# EAGLE board BSK1+BSK3+PL (EAGLE 9.4.2), part 1 of 2
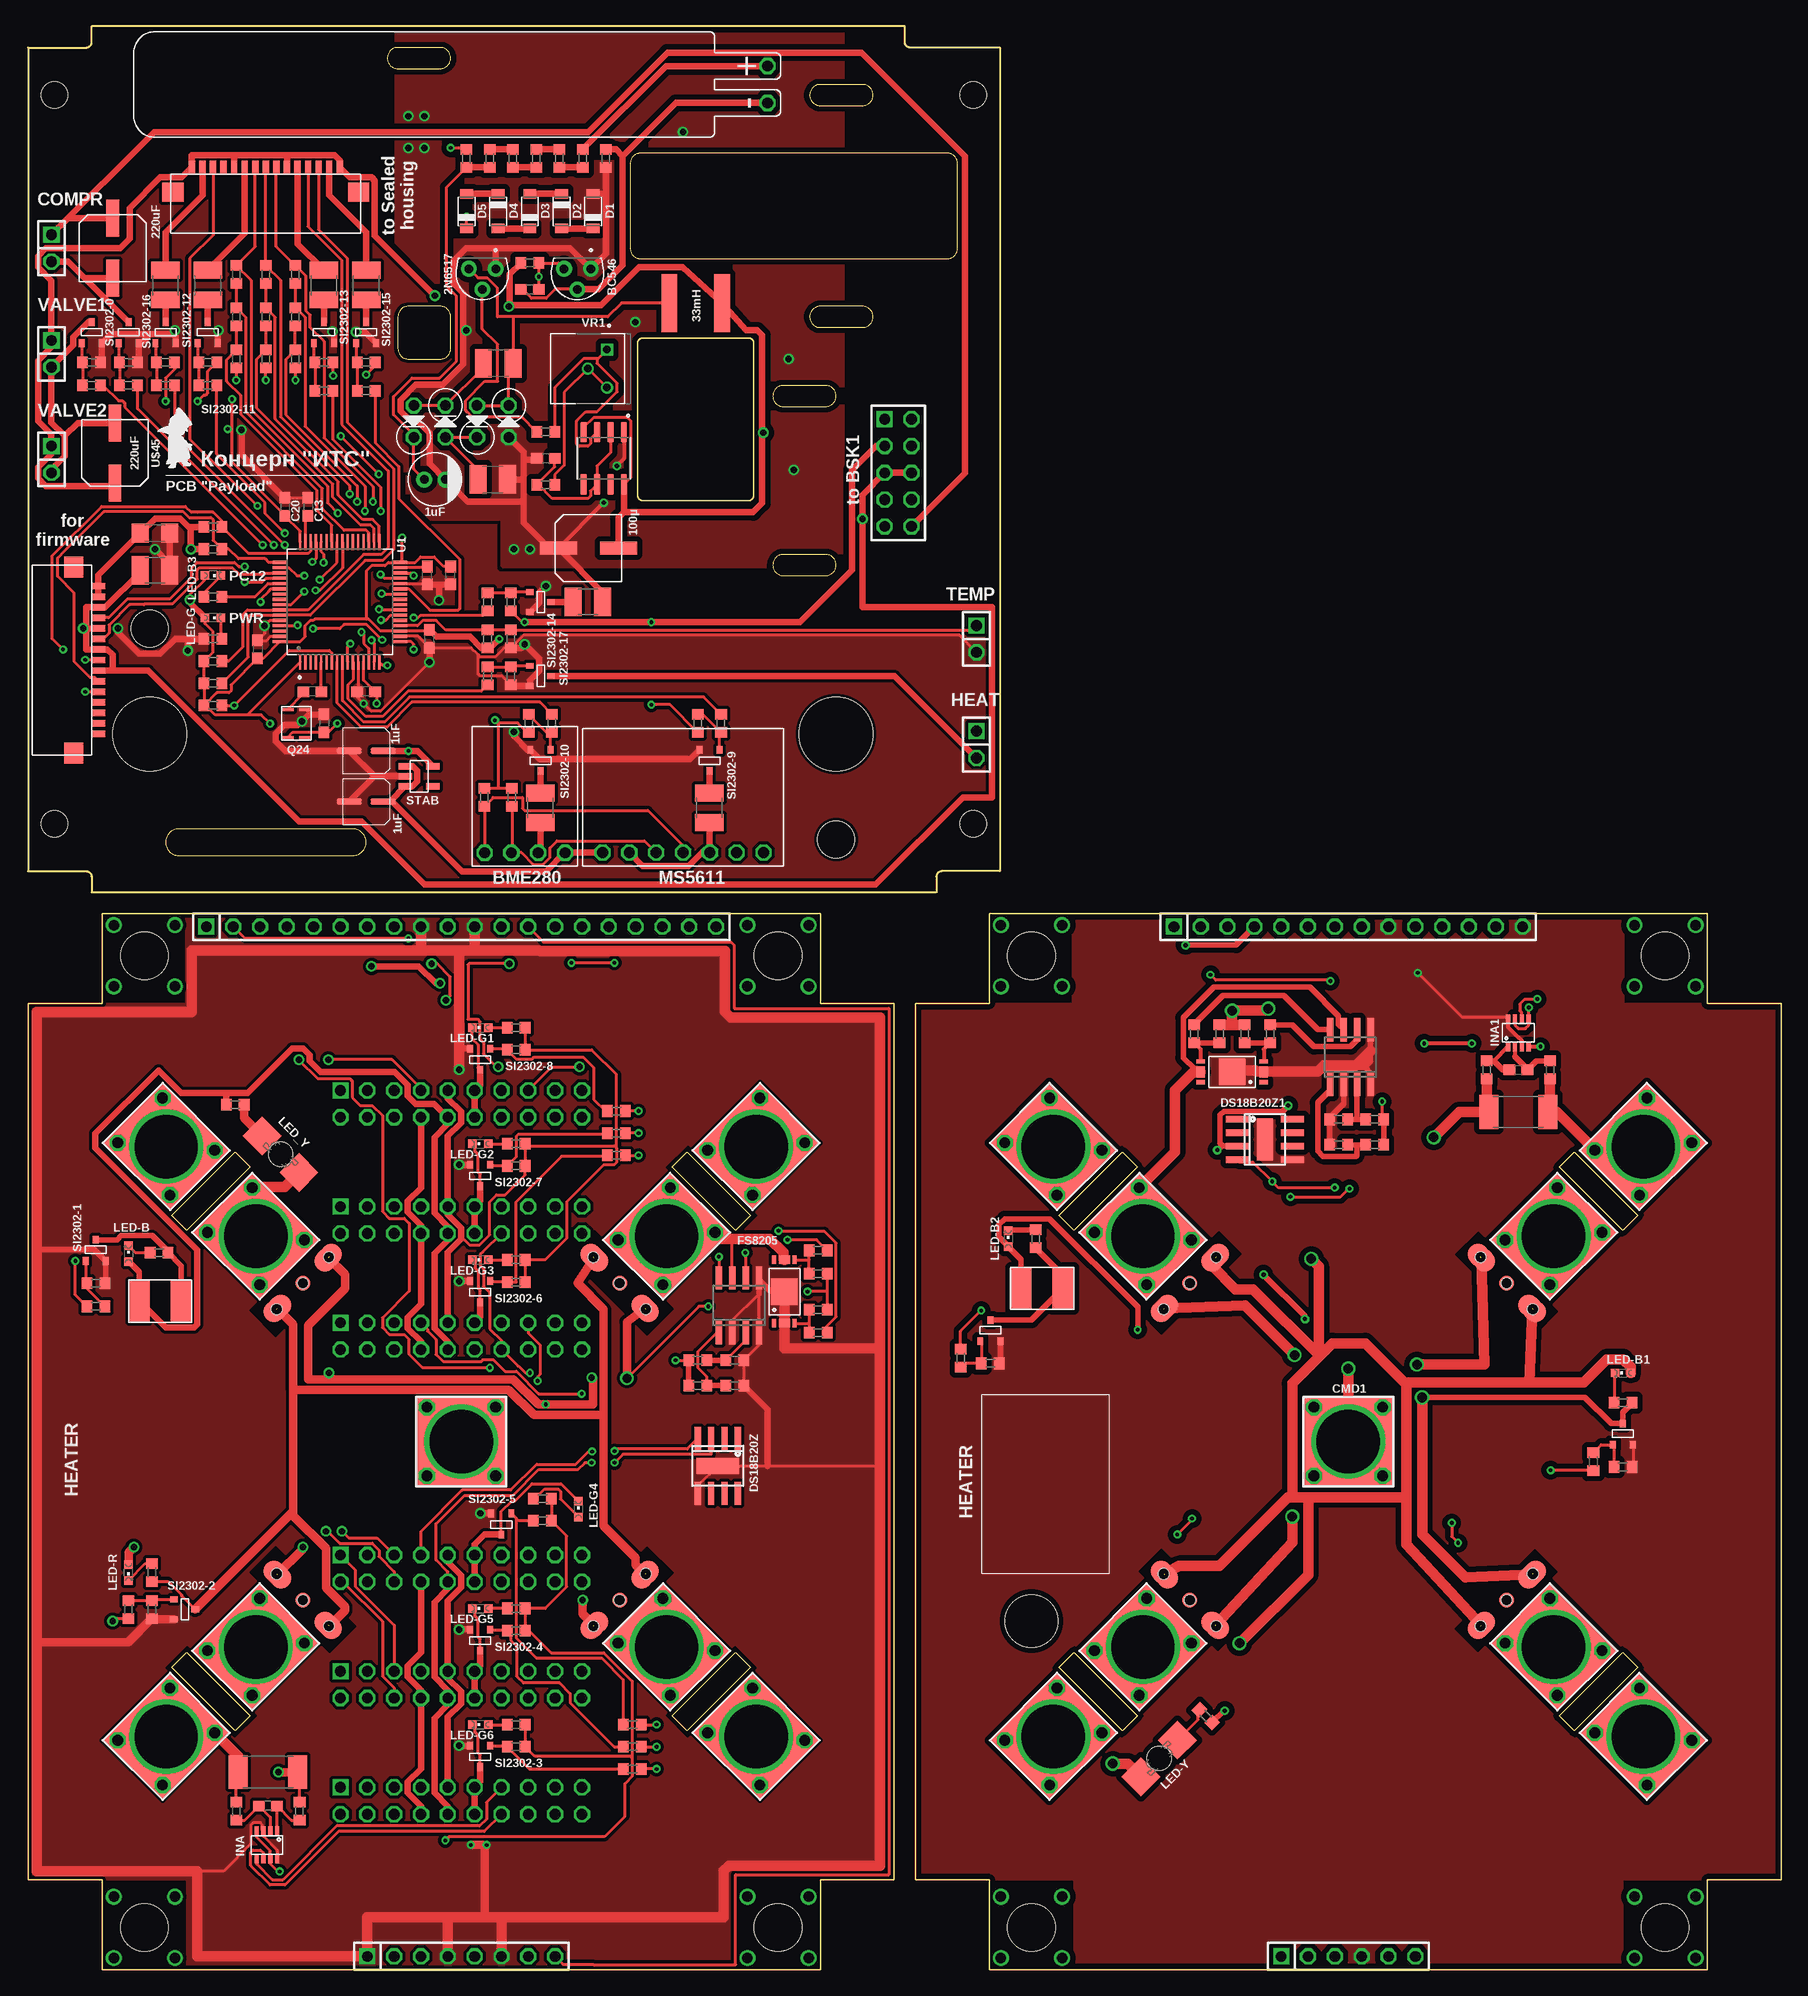
[diagram p0: board, top side]
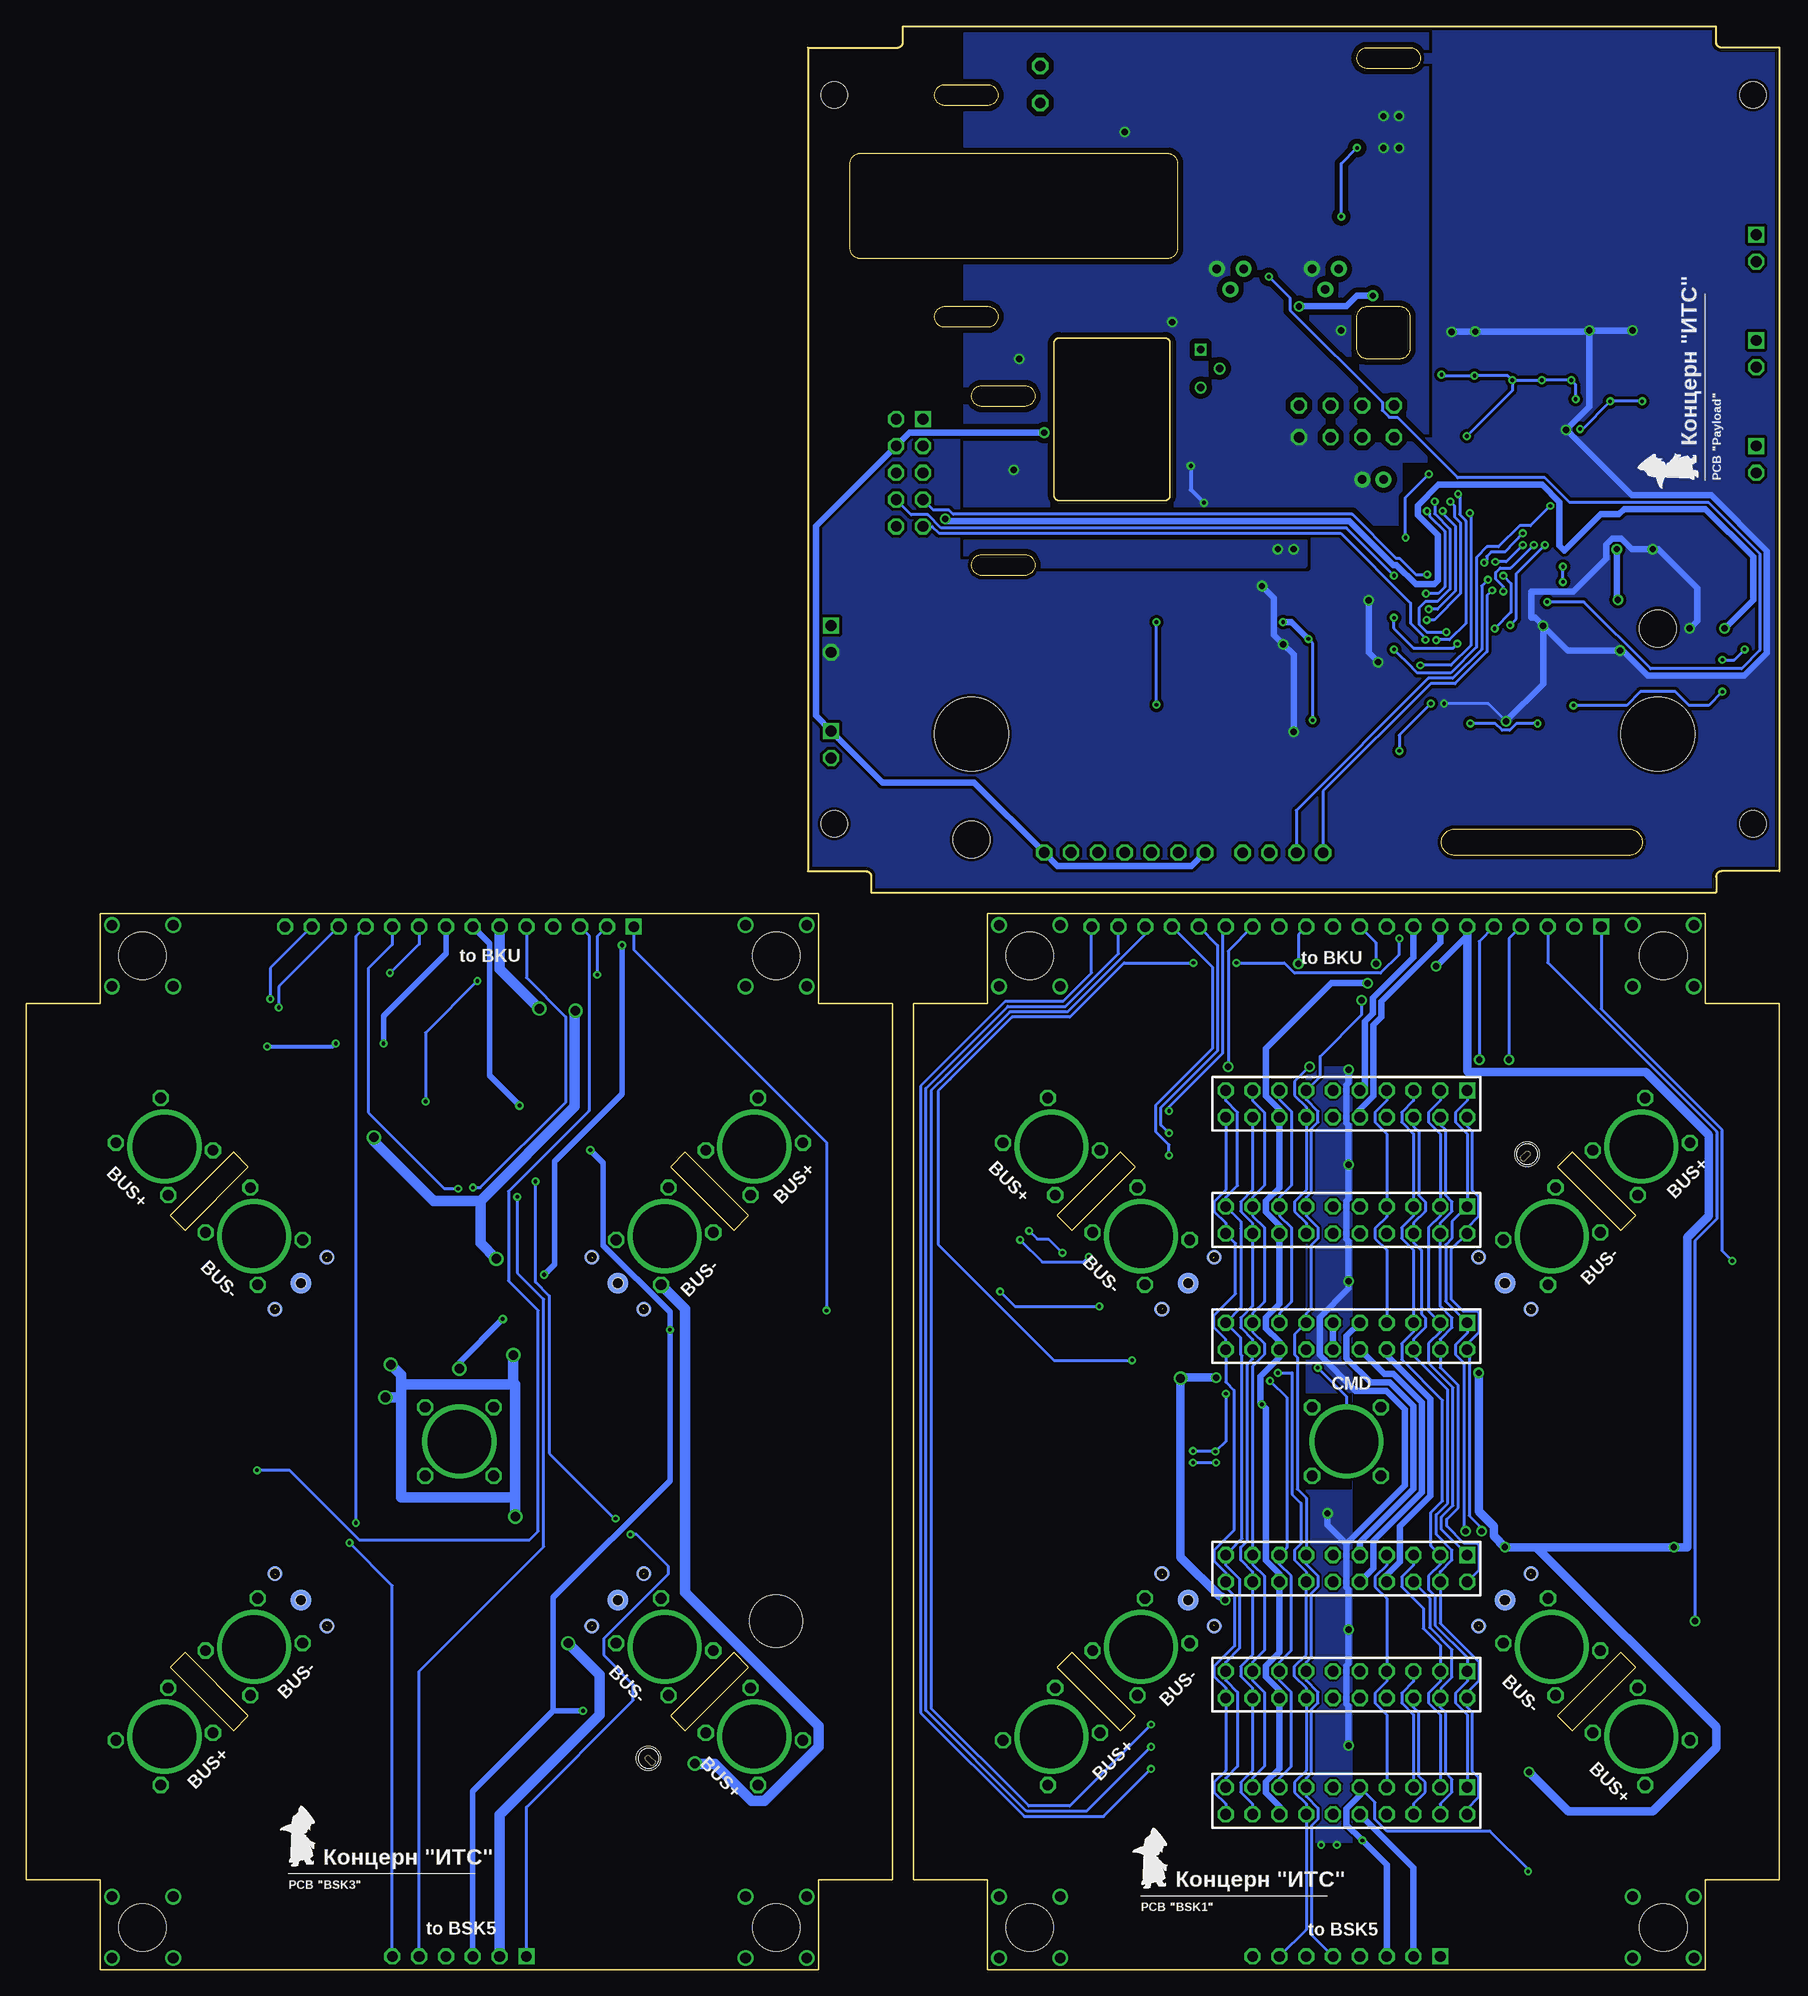
[diagram p1: board, bottom side, seen from below]

Size 166 x 184 mm. Coordinates in mm from the lower left corner, seen from the top.
Outline: 0,8.5 0,91.5 7,91.5 7,100 75,100 75,91.5 82,91.5 82,8.5 75,8.5 75,0 7,0 7,8.5 0,8.5
Outline: 60.98,24.01 66.99,30.02 68.4,28.61 62.39,22.6 60.98,24.01
Outline: 13.6,71.39 19.61,77.4 21.02,75.99 15.01,69.98 13.6,71.39
Outline: 66.99,69.98 60.98,75.99 62.39,77.4 68.4,71.39 66.99,69.98
Outline: 19.61,22.6 13.6,28.61 15.01,30.02 21.02,24.01 19.61,22.6
Outline: 84,8.5 84,91.5 91,91.5 91,100 159,100 159,91.5 166,91.5 166,8.5 159,8.5 159,0 91,0 91,8.5 84,8.5
Outline: 144.98,24.01 150.99,30.02 152.4,28.61 146.39,22.6 144.98,24.01
Outline: 97.6,71.39 103.61,77.4 105.02,75.99 99.01,69.98 97.6,71.39
Outline: 150.99,69.98 144.98,75.99 146.39,77.4 152.4,71.39 150.99,69.98
Outline: 103.61,22.6 97.6,28.61 99.01,30.02 105.02,24.01 103.61,22.6
Outline: 92,182 92,104 86.5,104 arc90 86,103.5 86,102 6,102 6,103.5 arc90 5.5,104 0,104 0,182 5.5,182 arc90 6,182.5 6,184 83,184 83,182.5 arc90 83.5,182 92,182
Outline: 39,182 35,182 arc180 35,180 39,180 arc180 39,182
Outline: 79,178.5 75,178.5 arc180 75,176.5 79,176.5 arc180 79,178.5
Outline: 79,157.5 75,157.5 arc180 75,155.5 79,155.5 arc180 79,157.5
Outline: 75.5,150 71.5,150 arc180 71.5,148 75.5,148 arc180 75.5,150
Outline: 75.5,134 71.5,134 arc180 71.5,132 75.5,132 arc180 75.5,134
Outline: 57,171 57,163 arc90 58,162 87,162 arc90 88,163 88,171 arc90 87,172 58,172 arc90 57,171
Outline: 39,157.5 36,157.5 arc90 35,156.5 35,153.5 arc90 36,152.5 39,152.5 arc90 40,153.5 40,156.5 arc90 39,157.5
Outline: 30.75,108 14.25,108 arc180 14.25,105.5 30.75,105.5 arc180 30.75,108
Copper layers (1*16): Top 0.035mm / dielectric 0.93mm / Bottom 0.035mm
Design rules "default *": minimum track width 0.2mm, minimum drill 0.35mm, track to track 0.2mm, track to pad 0.2mm, pad to pad 0.2mm, via to via 0.2mm, smd to smd 0.2mm, copper to edge 0.25mm, drill to drill 0.2mm, minimum pad ring 0.2mm, minimum via ring 0.2mm, stop-mask expansion 2mil, vias tented up to drill 0mil, thermal gap 10mil
Holes 4.5 mm at 11,4 71,4 71,96 11,96 95,4 155,4 155,96 95,96
Holes 5 mm at 95,33
Holes 2.5 mm at 2.5,177.5 2.5,108.5 89.5,108.5 89.5,177.5
Holes 3.5 mm at 11.5,127 76.5,107
Holes 7 mm at 11.5,117 76.5,117

## Footprints (pad centres in the part's own frame; a part is rotated, then mirrored left to right if it is on the bottom)
TO92/TO226 = drill 0.8 pad 1.5: 1 -1.27,-0.95; 2 0,1; 3 1.27,-0.95
1X20 = drill 1.016 square: 1 -24.13,0 | drill 1.016 octagon: 2 -21.59,0; 3 -19.05,0; 4 -16.51,0; 5 -13.97,0; 6 -11.43,0; 7 -8.89,0; 8 -6.35,0; 9 -3.81,0; 10 -1.27,0; 11 1.27,0; 12 3.81,0; 13 6.35,0; 14 8.89,0; 15 11.43,0; 16 13.97,0; 17 16.51,0; 18 19.05,0; 19 21.59,0; 20 24.13,0
1X14 = drill 1.016 square: 1 -16.51,0 | drill 1.016 octagon: 2 -13.97,0; 3 -11.43,0; 4 -8.89,0; 5 -6.35,0; 6 -3.81,0; 7 -1.27,0; 8 1.27,0; 9 3.81,0; 10 6.35,0; 11 8.89,0; 12 11.43,0; 13 13.97,0; 14 16.51,0
BME280-PINS-ONLY = drill 1.016 octagon: P$1 -3.81,5.33; P$2 -1.27,5.33; P$3 1.27,5.33; P$4 3.81,5.33
1X06 = drill 1.016 square: 1 -6.35,0 | drill 1.016 octagon: 2 -3.81,0; 3 -1.27,0; 4 1.27,0; 5 3.81,0; 6 6.35,0
2X05 = drill 1.016 square: 1 -5.08,-1.27 | drill 1.016 octagon: 2 -5.08,1.27; 3 -2.54,-1.27; 4 -2.54,1.27; 5 0,-1.27; 6 0,1.27; 7 2.54,-1.27; 8 2.54,1.27; 9 5.08,-1.27; 10 5.08,1.27
1X08 = drill 1.016 square: 1 -8.89,0 | drill 1.016 octagon: 2 -6.35,0; 3 -3.81,0; 4 -1.27,0; 5 1.27,0; 6 3.81,0; 7 6.35,0; 8 8.89,0
C0603 = smd 1.1 x 1: 1 -0.85,0; 2 0.85,0
C1210 = smd 1.6 x 2.7: 1 -1.4,0; 2 1.4,0
ECAP-SMD-D4 = smd 0.6 x 2.4: P+ 0,1.6; P- 0,-1.6
C1206 = smd 1.6 x 1.8: 1 -1.4,0; 2 1.4,0
KCONNECT_QUAD = drill 1.016 octagon: 1 -3.25,-3.25; 2 -3.25,3.25; 3 3.25,-3.25; 4 3.25,3.25 | drill 6: P$1 0,0 | smd 8.5 x 8.5: P$2 0,0
1X02 = drill 1.016 square: 1 -1.27,0 | drill 1.016 octagon: 2 1.27,0
SOD123 = smd 0.91 x 1.22: A 1.635,0; C -1.635,0
SOIC8+HEAT_S = smd 0.6 x 2.2: 1 -1.905,-2.6; 2 -0.635,-2.6; 3 0.635,-2.6; 4 1.905,-2.6; 5 1.905,2.6; 6 0.635,2.6; 7 -0.635,2.6; 8 -1.905,2.6 | smd 4 x 1.5: HEAT 0,0
FS8205A+ = smd 0.4 x 0.8: 1 -0.975,-3; 4 0.975,-3; 5 0.975,3; 8 -0.975,3 | smd 1.05 x 0.8: 23 0,-3; 67 0,3 | smd 2.5 x 2.5: HEAT 0,0
SOT23-8 = smd 0.9 x 0.4: 1 -1.3,0.975; 2 -1.3,0.325; 3 -1.3,-0.325; 4 -1.3,-0.975; 5 1.3,-0.975; 6 1.3,-0.325; 7 1.3,0.325; 8 1.3,0.975
2X10 = drill 1.016 square: 1 -11.43,-1.27 | drill 1.016 octagon: 2 -11.43,1.27; 3 -8.89,-1.27; 4 -8.89,1.27; 5 -6.35,-1.27; 6 -6.35,1.27; 7 -3.81,-1.27; 8 -3.81,1.27; 9 -1.27,-1.27; 10 -1.27,1.27; 11 1.27,-1.27; 12 1.27,1.27; 13 3.81,-1.27; 14 3.81,1.27; 15 6.35,-1.27; 16 6.35,1.27; 17 8.89,-1.27; 18 8.89,1.27; 19 11.43,-1.27; 20 11.43,1.27
CHIPLED_0603 = smd 0.8 x 0.8: A 0,-0.75; C 0,0.75
P47F-BOTTOM = smd 2.6 x 2.6: A -2.45,0; C 2.45,0 | hole 2.3: 0,0
MS5611-PINS-ONLY = drill 1.016 octagon: P$1 -7.62,5.23; P$2 -5.08,5.23; P$3 -2.54,5.23; P$4 0,5.23; P$5 2.54,5.23; P$6 5.08,5.23; P$7 7.62,5.23
Q24 = smd 0.3 x 1.2: P$1 -1.325,-0.85; P$2 1.325,-0.85; P$3 1.325,0.85; P$4 -1.325,0.85
R0603 = smd 1 x 1.1: 1 -0.85,0; 2 0.85,0
R2512 = smd 1.8 x 3.2: 1 -2.8,0; 2 2.8,0
R1210 = smd 1.6 x 2.7: 1 -1.4,0; 2 1.4,0
SOT23-3 = smd 0.56 x 0.73: 1 -0.95,-1; 2 0.95,-1; 3 0,1
SOT23-5 = smd 0.635 x 1.27: P$1 -0.95,-1.3; P$2 0,-1.3; P$3 0.95,-1.3; P$4 0.95,1.3; P$5 -0.95,1.3
QFP50P1200X1200X160-64N = smd 1.47 x 0.28: 1 -5.67,3.75; 2 -5.67,3.25; 3 -5.67,2.75; 4 -5.67,2.25; 5 -5.67,1.75; 6 -5.67,1.25; 7 -5.67,0.75; 8 -5.67,0.25; 9 -5.67,-0.25; 10 -5.67,-0.75; 11 -5.67,-1.25; 12 -5.67,-1.75; 13 -5.67,-2.25; 14 -5.67,-2.75; 15 -5.67,-3.25; 16 -5.67,-3.75; 33 5.67,-3.75; 34 5.67,-3.25; 35 5.67,-2.75; 36 5.67,-2.25; 37 5.67,-1.75; 38 5.67,-1.25; 39 5.67,-0.75; 40 5.67,-0.25; 41 5.67,0.25; 42 5.67,0.75; 43 5.67,1.25; 44 5.67,1.75; 45 5.67,2.25; 46 5.67,2.75; 47 5.67,3.25; 48 5.67,3.75 | smd 0.28 x 1.47: 17 -3.75,-5.67; 18 -3.25,-5.67; 19 -2.75,-5.67; 20 -2.25,-5.67; 21 -1.75,-5.67; 22 -1.25,-5.67; 23 -0.75,-5.67; 24 -0.25,-5.67; 25 0.25,-5.67; 26 0.75,-5.67; 27 1.25,-5.67; 28 1.75,-5.67; 29 2.25,-5.67; 30 2.75,-5.67; 31 3.25,-5.67; 32 3.75,-5.67; 49 3.75,5.67; 50 3.25,5.67; 51 2.75,5.67; 52 2.25,5.67; 53 1.75,5.67; 54 1.25,5.67; 55 0.75,5.67; 56 0.25,5.67; 57 -0.25,5.67; 58 -0.75,5.67; 59 -1.25,5.67; 60 -1.75,5.67; 61 -2.25,5.67; 62 -2.75,5.67; 63 -3.25,5.67; 64 -3.75,5.67
SOIC127P599X175-8N = smd 1.97 x 0.6: 1 -2.47,1.905; 2 -2.47,0.635; 3 -2.47,-0.635; 4 -2.47,-1.905; 5 2.47,-1.905; 6 2.47,-0.635; 7 2.47,0.635; 8 2.47,1.905
KCONNECT = drill 1.016 octagon: 1 -3,-3.5; 2 -3,3.5; 3 3,-3.5; 4 3,3.5 | drill 6: P$1 0,0 | smd 8 x 9: P$2 0,0
SOIC8 = smd 0.6 x 2.2: 1 -1.905,-2.6; 2 -0.635,-2.6; 3 0.635,-2.6; 4 1.905,-2.6; 5 1.905,2.6; 6 0.635,2.6; 7 -0.635,2.6; 8 -1.905,2.6
EM_HEAT = smd 2 x 4: 1 -2,0; 2 2,0
GRAFIT4_2 = smd 2 x 2 bottom: OUT 0,0 | smd 2 x 2.9: P$1 0,3.4; P$2 0,-3.4 | smd 1.4 x 1.4: P$3 0,0 | smd 1.4 x 1.4 bottom: P$4 0,3.5; P$5 0,-3.5 | hole 1: 0,3.5; 0,0; 0,-3.5
ECAP100-CMD = smd 1.2 x 3.5: P$1 0,2.85; P$2 0,-2.85
BA159 = drill 1 octagon: P$1 -1.5,0; P$2 1.5,0
ECAP1MK = drill 0.8 pad 1.5: P$1 -1,0; P$2 1,0
DOSIM = drill 1.016 octagon: P$1 -1.75,0; P$2 1.75,0
68611 = smd 0.6 x 1.3: P$1 -7,0.65; P$2 -6,0.65; P$3 -5,0.65; P$4 -4,0.65; P$5 -3,0.65; P$6 -2,0.65; P$7 -1,0.65; P$8 0,0.65; P$9 1,0.65; P$10 2,0.65; P$11 3,0.65; P$12 4,0.65; P$13 5,0.65; P$14 6,0.65; P$15 7,0.65 | smd 2 x 1.8: P$16 8.8,-1.7; P$17 -8.8,-1.7
RCH114NP = smd 5.5 x 1.5: P$1 3.8,-2.5; P$2 3.8,2.5
ECAP220-CMD = smd 1.2 x 3.5: P$1 0,2.85; P$2 0,-2.85
TRIM_3362H-1-502LF = drill 0.714 square: 1 -1.8,1.8 | drill 0.714: 2 0,0; 3 1.8,1.8

## Placement (x,y rotation side)
2N6517  DS1820  [TO92/TO226]  43,160.1 180 top
BC546  DS1820  [TO92/TO226]  52,160.1 180 top
BKU  [1X20]  41,98.75 0 top
BKU1  [1X14]  125,98.75 0 top
BME280  BME280BME280-PINS-ONLY  [BME280-PINS-ONLY]  47.02,111.08 180 top
BSK1  [1X06]  125,1.25 0 top
BSK2  [2X05]  82.37,141.73 270 top
BSK5  [1X08]  41,1.25 0 top
C1  0,1µ  [C0603]  141.1,85.2 0 top
C2  100nF  [C0603]  21.7,125 270 top
C3  100nF  [C0603]  32,121 180 top
C4  100nF  [C0603]  49,143.1 0 top
C5  22nF  [C1210]  44.5,152.1 180 top
C6  100nF  [C0603]  40,132 90 top
C7  22nF  [C1210]  44,141.1 0 top
C8  1nF  [C0603]  26.9,121 180 top
C9  2,2µ  [C0603]  37.8,132 90 top
C10  10nF  [C0603]  28,118 270 top
C11  100pF  [C0603]  47.5,159.1 0 top
C12  1uF  [ECAP-SMD-D4]  32,115.4 270 top
C13  2,2µ  [C0603]  26.5,138.5 270 top
C14  1uF  [ECAP-SMD-D4]  32,110.6 270 top
C18  100nF  [C0603]  38,126 90 top
C19  10µ  [C1206]  12,136 180 top
C20  100nF  [C0603]  24.3,138.5 270 top
C41  0,1µ  [C0603]  22.7,15.5 180 top
CMD  KCONNECTQUAD  [KCONNECT_QUAD]  41,50 0 top
CMD1  KCONNECTQUAD  [KCONNECT_QUAD]  125,50 0 top
COMPR  [1X02]  2.2,163 270 top
D1  DIODE-MBR  [SOD123]  53.5,166.5 90 top
D2  DIODE-MBR  [SOD123]  50.5,166.5 270 top
D3  DIODE-MBR  [SOD123]  47.5,166.5 90 top
D4  DIODE-MBR  [SOD123]  44.5,166.5 270 top
D5  DIODE-MBR  [SOD123]  41.5,166.5 90 top
DS18B20Z  DS18B20Z  [SOIC8+HEAT_S]  65.3,47.7 180 top
DS18B20Z1  DS18B20Z  [SOIC8+HEAT_S]  117.1,78.6 270 top
FS8205  FS8205A+  [FS8205A+]  71.6,64.2 0 top
HEAT  [1X02]  89.8,116 270 top
INA  INA219AID  [SOT23-8]  22.6,11.8 270 top
INA1  INA219AID  [SOT23-8]  141.1,88.7 90 top
JP1  [2X10]  41,81.98 180 bottom
JP2  [2X10]  41,70.98 180 bottom
JP3  [2X10]  41,59.98 180 bottom
JP4  [2X10]  41,37.98 180 bottom
JP5  [2X10]  41,26.98 180 bottom
JP6  [2X10]  41,15.98 180 bottom
LED-B  [CHIPLED_0603]  9.5,67.8 0 top
LED-B1  [CHIPLED_0603]  151,56.5 90 top
LED-B2  [CHIPLED_0603]  92.8,69.2 0 top
LED-B3  [CHIPLED_0603]  17.5,132 270 top
LED-G  [CHIPLED_0603]  17.5,128 270 top
LED-G1  [CHIPLED_0603]  42.8,89.2 90 top
LED-G2  [CHIPLED_0603]  42.8,78.2 90 top
LED-G3  [CHIPLED_0603]  42.8,67.2 90 top
LED-G4  [CHIPLED_0603]  52.1,43.6 0 top
LED-G5  [CHIPLED_0603]  42.8,34.2 90 top
LED-G6  [CHIPLED_0603]  42.8,23.2 90 top
LED-R  [CHIPLED_0603]  9.5,37.6 180 top
LED-Y  LAP4-BOTTOM  [P47F-BOTTOM]  107.1,20 225 top
LED_Y  LAP4-BOTTOM  [P47F-BOTTOM]  23.9,77.2 315 top
MS5611  MS5611MS5611-PIN-ONLY  [MS5611-PINS-ONLY]  62,111 180 top
Q24  Q24  [Q24]  25.4,118 90 top
R1  200k  [R0603]  66.9,55.3 180 top
R2  200k  [R0603]  66.9,57.7 180 top
R3  100R  [R0603]  74.8,60.3 0 top
R4  100k  [R0603]  74.8,65.9 180 top
R5  100R  [R0603]  74.8,68.1 0 top
R6  1M  [R0603]  46.2,87.1 180 top
R7  100k  [R0603]  74.8,62.5 0 top
R8  1M  [R0603]  46.2,76.1 0 top
R9  1M  [R0603]  46.2,65.1 180 top
R10  2k  [R0603]  19.6,81.9 0 top
R11  2k  [R0603]  12.4,67.9 0 top
R12  1M  [R0603]  48.7,42.5 180 top
R13  1M  [R0603]  46.2,32.1 0 top
R14  1M  [R0603]  46.2,21.1 180 top
R15  2k  [R0603]  46.2,78.2 180 top
R16  2k  [R0603]  46.2,89.2 180 top
R17  2k  [R0603]  46.2,67.2 180 top
R18  1M  [R0603]  6.4,65 0 top
R19  3k3  [R0603]  11.7,37.6 270 top
R20  1M  [R0603]  11.7,34.1 270 top
R21  2k  [R0603]  48.7,44.6 180 top
R22  2k  [R0603]  46.2,34.2 180 top
R23  2k  [R0603]  46.2,23.2 180 top
R24  2k26  [R0603]  63.4,55.3 180 top
R25  2k26  [R0603]  63.4,57.7 180 top
R26  100R  [R0603]  57.2,21.1 0 top
R27  100R  [R0603]  55.7,77.1 0 top
R28  100R  [R0603]  55.7,81.3 0 top
R29  100R  [R0603]  55.7,79.2 0 top
R30  100R  [R0603]  57.2,23.2 0 top
R31  100R  [R0603]  57.2,19 0 top
R32  100R  [R0603]  6.4,62.8 180 top
R33  100R  [R0603]  9.5,34.1 270 top
R34  100R  [R0603]  117.6,88.6 90 top
R35  100R  [R0603]  110.4,88.6 90 top
R36  100k  [R0603]  112.8,88.6 270 top
R37  100k  [R0603]  115.2,88.6 90 top
R38  2k  [R0603]  111.5,24 135 top
R39  2k  [R0603]  95.4,69.2 270 top
R40  1M  [R0603]  91.1,57.4 0 top
R41  1k5  [R0603]  151,53.7 0 top
R42  1M  [R0603]  151,47.6 0 top
R43  R01  [R2512]  141.1,81.2 180 top
R44  10R  [R0603]  138.1,85.2 90 top
R45  10R  [R0603]  144.1,85.2 90 top
R46  2k26  [R0603]  127.5,78.1 0 top
R47  2k26  [R0603]  127.5,80.5 0 top
R48  100R  [R0603]  88.3,57.9 90 top
R49  100R  [R0603]  148.2,48.1 270 top
R50  10k  [R0603]  17.5,119.7 180 top
R51  2k  [R0603]  17.5,130 180 top
R52  10k  [R0603]  17.5,136.6 180 top
R53  10k  [R0603]  17.5,134.5 180 top
R54  2k  [R0603]  17.5,126 0 top
R55  5k1  [R0603]  17.5,123.9 0 top
R56  5k1  [R0603]  17.5,121.8 0 top
R57  0.05A  [R1210]  64.5,110 90 top
R58  1M  [R0603]  63.4,118 270 top
R59  100R  [R0603]  65.6,118 270 top
R60  1M  [R0603]  47.4,118 270 top
R61  100R  [R0603]  49.6,118 270 top
R62  0.05A  [R1210]  48.5,110 90 top
R63  1M  [R0603]  17,152.2 0 top
R64  100R  [R0603]  17,150 180 top
R65  1M  [R0603]  13,152.2 0 top
R66  100R  [R0603]  13,150 180 top
R67  0.05A  [R1210]  13,159.5 270 top
R68  1M  [R0603]  28,152.2 0 top
R69  100R  [R0603]  28,149.5 180 top
R70  0.05A  [R1210]  28,159.5 270 top
R71  1M  [R0603]  45.7,129.5 270 top
R72  100R  [R0603]  43.5,129.5 90 top
R73  0.05A  [R1210]  53,129.5 180 top
R74  0.05A  [R1210]  17,159.5 270 top
R75  R01  [R2512]  22.7,18.7 0 top
R76  10R  [R0603]  25.7,15 270 top
R77  10R  [R0603]  19.7,15 270 top
R78  0.5A  [R1210]  12,132.5 180 top
R79  1k  [R0603]  49,140.6 0 top
R80  4k7  [R0603]  49,145.6 0 top
R81  22k  [R0603]  41.5,171.5 270 top
R82  1M  [R0603]  43.7,171.5 270 top
R83  1M  [R0603]  45.9,171.5 270 top
R84  1M  [R0603]  48.1,171.5 270 top
R85  1M  [R0603]  50.3,171.5 270 top
R86  1M  [R0603]  52.5,171.5 270 top
R87  100k  [R0603]  54.7,171.5 270 top
R88  3k3  [R0603]  47.5,161.6 0 top
R89  10k  [R0603]  25.3,160.5 270 top
R90  10k  [R0603]  22.5,160.5 270 top
R91  10k  [R0603]  19.7,160.5 270 top
R92  10k  [R0603]  25.3,156.5 270 top
R93  10k  [R0603]  22.5,156.5 270 top
R94  200k  [R0603]  124.1,78.1 0 top
R95  200k  [R0603]  124.1,80.5 0 top
R96  10k  [R0603]  19.7,156.5 270 top
R97  10k  [R0603]  19.7,152.5 270 top
R98  10k  [R0603]  22.5,152.5 270 top
R99  10k  [R0603]  25.3,152.5 270 top
R100  1M  [R0603]  32,152.2 0 top
R101  100R  [R0603]  32,149.5 180 top
R102  0.05A  [R1210]  32,159.5 270 top
R103  1M  [R0603]  6,152.2 0 top
R104  100R  [R0603]  6,150 180 top
R105  1M  [R0603]  9.5,152.2 0 top
R106  100R  [R0603]  9.5,150 180 top
R107  1M  [R0603]  45.7,122.5 270 top
R108  100R  [R0603]  43.5,122.5 90 top
R109  124k  [R0603]  45.7,126 90 top
R110  22k  [R0603]  43.5,126 270 top
R111  5k1  [R0603]  43.2,111 270 top
R112  5k1  [R0603]  45.8,111 270 top
SI2302-0  SI2302CDS  [SOT23-3]  6,155 0 top
SI2302-1  SI2302CDS  [SOT23-3]  6.4,68.1 0 top
SI2302-2  SI2302CDS  [SOT23-3]  14.8,34.1 270 top
SI2302-3  SI2302CDS  [SOT23-3]  42.8,20.2 180 top
SI2302-4  SI2302CDS  [SOT23-3]  42.8,31.2 180 top
SI2302-5  SI2302CDS  [SOT23-3]  44.8,42.2 180 top
SI2302-6  SI2302CDS  [SOT23-3]  42.8,64.2 180 top
SI2302-7  SI2302CDS  [SOT23-3]  42.8,75.2 180 top
SI2302-8  SI2302CDS  [SOT23-3]  42.8,86.2 180 top
SI2302-9  SI2302CDS  [SOT23-3]  64.5,114.5 180 top
SI2302-10  SI2302CDS  [SOT23-3]  48.5,114.5 180 top
SI2302-11  SI2302CDS  [SOT23-3]  17,155 0 top
SI2302-12  SI2302CDS  [SOT23-3]  13,155 0 top
SI2302-13  SI2302CDS  [SOT23-3]  28,155 0 top
SI2302-14  SI2302CDS  [SOT23-3]  48.5,129.5 270 top
SI2302-15  SI2302CDS  [SOT23-3]  32,155 0 top
SI2302-16  SI2302CDS  [SOT23-3]  9.5,155 0 top
SI2302-17  SI2302CDS  [SOT23-3]  48.5,122.5 270 top
STAB  ADP150AUJZ-3.3-R7  [SOT23-5]  37,113 270 top
TEMP  [1X02]  89.8,126 270 top
U1  STM32F405RGT6  [QFP50P1200X1200X160-64N]  29.5,129.5 90 top
U2  LMC555  [SOIC127P599X175-8N]  54.5,143.1 270 top
U$1  KCONNECT  [KCONNECT]  13.07,77.93 45 top
U$2  KCONNECT  [KCONNECT]  21.55,69.44 45 top
U$3  KCONNECT  [KCONNECT]  68.93,77.93 315 top
U$4  KCONNECT  [KCONNECT]  60.45,69.44 315 top
U$5  KCONNECT  [KCONNECT]  97.07,77.93 45 top
U$6  KCONNECT  [KCONNECT]  97.07,22.07 135 top
U$7  KCONNECT  [KCONNECT]  105.56,30.55 135 top
U$8  KCONNECT  [KCONNECT]  105.56,69.44 45 top
U$9  KCONNECT  [KCONNECT]  152.93,22.07 225 top
U$10  KCONNECT  [KCONNECT]  144.44,30.55 225 top
U$11  KCONNECT  [KCONNECT]  152.93,77.93 315 top
U$12  KCONNECT  [KCONNECT]  144.44,69.44 315 top
U$13  FS8205A+  [FS8205A+]  114,85 90 top
U$14  MOCD  [SOIC8]  125.2,86.4 0 top
U$15  SI2302CDS  [SOT23-3]  91.1,60.5 0 top
U$16  EM_HEAT  [EM_HEAT]  96,64.5 0 top
U$17  SI2302CDS  [SOT23-3]  151,50.7 0 top
U$18  KCONNECT  [KCONNECT]  13.07,22.07 135 top
U$19  KCONNECT  [KCONNECT]  21.55,30.55 135 top
U$20  KCONNECT  [KCONNECT]  68.93,22.07 225 top
U$21  KCONNECT  [KCONNECT]  60.45,30.55 225 top
U$22  MOCD  [SOIC8]  67.3,62.9 0 top
U$23  GRAFITGRAFIT4_2  [GRAFIT4_2]  110,65 135 top
U$24  EM_HEAT  [EM_HEAT]  12.5,63.3 0 top
U$25  GRAFITGRAFIT4_2  [GRAFIT4_2]  110,35 225 top
U$26  PCB "BSK1"  [ITS-LOGO]  60.5,7 0 bottom
U$27  GRAFITGRAFIT4_2  [GRAFIT4_2]  56,65 45 top
U$28  GRAFITGRAFIT4_2  [GRAFIT4_2]  26,35 225 top
U$29  GRAFITGRAFIT4_2  [GRAFIT4_2]  26,65 135 top
U$30  GRAFITGRAFIT4_2  [GRAFIT4_2]  56,35 315 top
U$31  GRAFITGRAFIT4_2  [GRAFIT4_2]  140,65 45 top
U$32  GRAFITGRAFIT4_2  [GRAFIT4_2]  140,35 315 top
U$33  PCB "BSK3"  [ITS-LOGO]  141.2,9.1 0 bottom
U$34  100µ  [ECAP100-CMD]  53.05,134.6 90 top
U$35  BA159  [BA159]  45.5,146.6 90 top
U$36  BA159  [BA159]  42.5,146.6 270 top
U$37  BA159  [BA159]  39.5,146.6 90 top
U$38  BA159  [BA159]  36.5,146.6 270 top
U$39  1uF  [ECAP1MK]  38.5,141.1 0 top
U$40  DOSIM  [DOSIM]  70,178.5 270 top
U$41  FFC-CONNECT68611  [68611]  22.5,170 0 top
U$42  33mH  [RCH114NP]  63.2,154 90 top
U$43  FFC-CONNECT68611  [68611]  6,124 270 top
U$44  220uF  [ECAP220-CMD]  8,163 0 top
U$45  220uF  [ECAP220-CMD]  8.2,143.6 180 top
U$46  PCB "Payload"  [ITS-LOGO]  13,141.5 0 top
U$47  PCB "Payload"  [ITS-LOGO]  7,141 90 bottom
VALVE1  [1X02]  2.2,153 270 top
VALVE2  [1X02]  2.2,143 270 top
VR1  3362H-1-502LF  [TRIM_3362H-1-502LF]  53,151.6 270 top

## Library data of the parts
2N6517 BC546 = CanCubeSat; AVAILABILITY: Bad; DESCRIPTION: Temperature Sensor Digital, Local -55°C ~ 125°C 9 b TO-92-3; MF: Maxim Integrated; MP: DS1820; PACKAGE: TO-226-3 Maxim; PRICE: None
BKU BKU1 BSK1 BSK2 BSK5 COMPR HEAT JP1-JP6 TEMP VALVE1 VALVE2 = pinheadCS
BME280 C12 C14 CMD CMD1 DS18B20Z DS18B20Z1 FS8205 INA INA1 MS5611 Q24 SI2302-0 SI2302-1-SI2302-17 STAB U$1-U$47 = CanCubeSat
C1-C11 C13 C18-C20 C41 = rcl; SPICEPREFIX: C
D1-D5 = CanCubeSat; AVAILABILITY: Good; DESCRIPTION: Diode Schottky 20V 500mA Surface Mount SOD-123; MF: ON Semiconductor; MP: MBR0520LT1G; PACKAGE: SOD-123-2 ON Semiconductor; PRICE: None; PURCHASE-URL: https://pricing.snapeda.com/search/part/MBR0520LT1G/?ref=eda
LED-B LED-B1-LED-B3 LED-G LED-G1-LED-G6 LED-R LED-Y LED_Y = led
R1-R42 R44-R56 R58-R61 R63-R66 R68 R69 R71 R72 R76 R77 R79-R101 R103-R112 = resistor
R43 R57 R62 R67 R70 R73-R75 R78 R102 = rcl; SPICEPREFIX: R
U1 = STM32F405RGT6; DESCRIPTION: High-performance foundation line, ARM Cortex-M4 core with DSP and FPU, 1 Mbyte Flash, 168 MHz CPU, ART Accelerator; DIGI-KEY_PART_NUMBER: 497-11767-ND; DIGI-KEY_PURCHASE_URL: https://www.digikey.com/product-detail/en/stmicroelectronics/STM32F405RGT6/497-11767-ND/2754208?utm_source=snapeda&utm_medium=aggregator&utm_campaign=symbol; MF: STMicroelectronics; MP: STM32F405RGT6; PACKAGE: LQFP-64 STMicroelectronics
U2 = LMC555CMX_NOPB; AVAILABILITY: Good; DESCRIPTION: Worlds smallest 555 timer with low power, high accuracy and a Fmax of 3MHz 8-SOIC -40 to 85; MF: Texas Instruments; MP: LMC555CMX/NOPB; PACKAGE: SOIC-8 Texas Instruments; PRICE: None; PURCHASE-URL: https://pricing.snapeda.com/search/part/LMC555CMX/NOPB/?ref=eda
VR1 = CanCubeSat; AVAILABILITY: Good; DESCRIPTION: 5 kOhms 0.5W, 1/2W PC Pins Through Hole Trimmer Potentiometer Cermet 1 Turn Top Adjustment; MF: Bourns; MP: 3362P-1-502LF; PACKAGE: 3362P-1 Bourns Inc.; PRICE: None; PURCHASE-URL: https://pricing.snapeda.com/search/part/3362P-1-502LF/?ref=eda

## Nets
1: R39.2 U$15.3 U$16.2
1W: BKU.5 DS18B20Z.4 JP1.7 JP2.7 JP3.7 JP4.7 JP5.7 JP6.7
1W1: BKU1.5 BSK1.1 DS18B20Z1.4
2: R41.2 U$17.3 U$23.P$1 U$23.P$4 U$25.P$1 U$25.P$4 U$31.P$1 U$31.P$4 U$32.P$1 U$32.P$4
3: R11.2 SI2302-1.3 U$24.2
3V1: BKU1.8 INA1.4
3V2: BSK2.3 C2.2 C6.2 C10.2 C18.2 C19.2 C20.2 LED-B3.A LED-G.A Q24.P$4 R50.2 R52.2 R53.2 R55.1 R56.1 R58.2 R60.2 R63.2 R65.2 R68.2 R71.2 R97.2 R98.2 R99.2 R100.2 R110.2 R111.1 R112.1 U1.1 U1.19 U1.32 U1.48 U1.64 U$43.P$1 U$43.P$2
3V3: BKU.8 BSK5.3 INA.4 INA.7 JP1.9 JP2.9 JP3.9 JP4.9 JP5.9 JP6.9 R6.1 R8.2 R9.1 R12.1 R13.2 R14.1 R15.1 R16.1 R17.1 R21.1 R22.1 R23.1
4: R19.2 SI2302-2.3 U$27.P$1 U$27.P$4 U$28.P$1 U$28.P$4 U$29.P$1 U$29.P$4 U$30.P$1 U$30.P$4
4OXV: R66.1 U1.45
5V: BKU.7 BSK5.2 DS18B20Z.3 JP1.10 JP2.10 JP3.10 JP4.10 JP5.10 JP6.10 LED-B.A R10.1 U$24.1
5V1: BKU1.7 BSK1.3 DS18B20Z1.3 LED-B2.A R38.1 U$16.1
5V2: BME280.P$1 BSK2.4 C14.P+ HEAT.1 MS5611.P$1 MS5611.P$7 R88.1 STAB.P$1 STAB.P$3 U2.4 U2.8 U$34.P$2 U$41.P$1 U$41.P$5 U$41.P$10 U$41.P$15 U$42.P$1 U$45.P$1 VALVE1.1 VALVE2.1
B1-CMD: BKU.4 CMD.1 CMD.2 CMD.3 CMD.4 CMD.P$1 CMD.P$2
B1-KHEAT: BKU.1 R32.2
B1-KVCC: BKU.2 R24.2 R25.2
B1-ROZE: BKU.3 R33.2
B3-CMD: BKU1.4 CMD1.1 CMD1.2 CMD1.3 CMD1.4 CMD1.P$1 CMD1.P$2
B3-KHEAT: BKU1.1 R48.2
B3-KVCC: BKU1.2 R46.2 R47.2
B3-ROZE: BKU1.3 R49.2
B5-KHEAT: BKU1.10 BSK1.5
BME280-EXT: R61.1 U1.8
BME280-INT: R101.1 U1.27
BMS1: JP1.1 JP2.1 JP3.1 JP4.5 JP5.3 JP6.3
BMS2: JP1.2 JP2.2 JP3.2 JP4.6 JP5.4 JP6.4
BMS3: JP1.3 JP2.3 JP3.3 JP4.1 JP5.5 JP6.5
BMS4: JP1.4 JP2.4 JP3.4 JP4.2 JP5.6 JP6.6
BMS5: JP1.5 JP2.5 JP3.5 JP4.3 JP5.1 JP6.1
BMS6: JP1.6 JP2.6 JP3.6 JP4.4 JP5.2 JP6.2
BMS+: JP1.8 JP2.8 JP3.8 JP4.8 JP5.8 JP6.8
BUS+: BKU.6 JP1.16 JP2.16 JP3.16 JP4.16 JP5.16 JP6.16 LED-R.A R4.1 R7.2 R75.2 R76.1 U$27.P$2 U$27.P$5 U$28.P$2 U$28.P$5 U$29.P$2 U$29.P$5 U$30.P$2 U$30.P$5
BUS+1: BKU1.6 BSK1.2 LED-B1.A R36.1 R37.2 R43.2 R44.1 U$23.P$2 U$23.P$5 U$25.P$2 U$25.P$5 U$31.P$2 U$31.P$5 U$32.P$2 U$32.P$5
BUS+2: BSK2.10 COMPR.1 U$44.P$1
CO: R91.1 U1.16 U$41.P$7
COMPR: R106.1 U1.57
CTRL-CO-1: R91.2 R96.1 U1.35
CTRL-CO-2: R96.2 R97.1 U1.42
CTRL-NH3-1: R90.2 R93.1 U1.33
CTRL-NH3-2: R93.2 R98.1 U1.34
CTRL-NO2-1: R89.2 R92.1 U1.23
CTRL-NO2-2: R92.2 R99.1 U1.22
DOS-G: 2N6517.1 BC546.1 C4.1 C7.2 D1.A R73.1 R87.2 U2.1 U$34.P$1 U$35.P$1 U$39.P$2
DOSE: BC546.3 C11.2 R88.2 U1.54
DOSIM: R72.1 U1.10
G-4OXV: R67.1 U$41.P$2
G-BME: R102.1 U$41.P$14
G-MICS: R74.1 U$41.P$6
G-MS: R70.1 U$41.P$11
GND: BKU.9 BKU.11 BSK5.1 BSK5.4 BSK5.6 DS18B20Z.5 DS18B20Z.HEAT FS8205.23 FS8205.HEAT INA.3 INA.8 R1.1 R2.1 R18.2 R20.2 SI2302-1.2 SI2302-2.2 SI2302-3.2 SI2302-4.2 SI2302-5.2 SI2302-6.2 SI2302-7.2 SI2302-8.2 U$22.2 U$22.4 U$22.5
GND4: BKU1.9 BKU1.14 BSK1.4 DS18B20Z1.5 DS18B20Z1.HEAT INA1.3 INA1.8 R40.2 R42.2 R94.1 R95.1 U$13.23 U$13.HEAT U$14.2 U$14.4 U$14.5 U$15.2 U$17.2
GND9: C2.1 C3.2 C6.1 C9.1 C10.1 C12.P- C13.1 C14.P- C18.1 C19.1 C20.1 Q24.P$2 R54.1 R78.1 R103.2 R105.2 R107.2 R109.1 SI2302-0.2 SI2302-9.2 SI2302-10.2 SI2302-11.2 SI2302-12.2 SI2302-13.2 SI2302-14.2 SI2302-15.2 SI2302-16.2 SI2302-17.2 STAB.P$2 TEMP.2 U1.12 U1.18 U1.28 U1.60 U1.63
GND-4OXV: R67.2 SI2302-12.3
GND-BME-EXT: R62.2 SI2302-10.3
GND-BME-INT: R102.2 SI2302-15.3
GND-COMPR: COMPR.2 SI2302-16.3 U$44.P$2
GND-DOSIM: R73.2 SI2302-14.3
GND-HEAT: HEAT.2 SI2302-17.3
GND-MICS: R74.2 SI2302-11.3
GND-MS-EXT: R57.2 SI2302-9.3
GND-MS-INT: R70.2 SI2302-13.3
GND-OUT: BSK2.5 BSK2.6 R78.2 U$43.P$3 U$43.P$5 U$43.P$7 U$43.P$9
GND-VALVE: SI2302-0.3 U$45.P$2 VALVE1.2 VALVE2.2
HEAT: R108.1 U1.11
MICS: R64.1 U1.44
MS5611-EXT: R59.1 U1.9
MS5611-INT: R69.1 U1.26
N$1: FS8205.5 R4.2 R5.1
N$2: LED-B.C R11.1
N$3: LED-R.C R19.1
N$4: LED-G1.A R16.2
N$21: LED-G3.A R17.2
N$22: LED-G4.A R21.2
N$23: LED-G5.A R22.2
N$24: LED-G6.A R23.2
N$25: R1.2 R24.1 U$22.1
N$26: R2.2 R25.1 U$22.3
N$27: FS8205.4 R3.1 R7.1
N$28: LED_Y.A R10.2
N$29: R13.1 R26.1 SI2302-4.1
N$30: R9.2 R27.1 SI2302-6.1
N$31: R6.2 R28.1 SI2302-8.1
N$32: R14.2 R31.1 SI2302-3.1
N$33: R35.1 R36.2 U$13.5
N$34: R8.1 R29.1 SI2302-7.1
N$35: R12.2 R30.1 SI2302-5.1
N$36: R18.1 R32.1 SI2302-1.1
N$37: R20.1 R33.1 SI2302-2.1
N$38: LED-G2.A R15.2
N$39: R34.1 R37.1 U$13.4
N$40: LED-Y.A R38.2
N$41: LED-B2.C R39.1
N$42: LED-B1.C R41.1
N$43: C1.1 INA1.1 R44.2
N$44: C1.2 INA1.2 R45.2
N$45: R46.1 R94.2 U$14.1
N$46: R47.1 R95.2 U$14.3
N$63: R40.1 R48.1 U$15.1
N$64: R42.1 R49.1 U$17.1
N$65: R51.1 U1.53
N$66: C13.2 U1.47
N$67: C9.2 U1.31
N$68: C8.1 U1.5
N$69: LED-B3.C R51.2
N$70: C8.2 Q24.P$3
N$71: R58.1 R59.2 SI2302-9.1
N$72: MS5611.P$3 MS5611.P$6 R57.1
N$73: R60.1 R61.2 SI2302-10.1
N$74: BME280.P$2 R62.1
N$75: R63.1 R64.2 SI2302-11.1
N$76: R65.1 R66.2 SI2302-12.1
N$77: R68.1 R69.2 SI2302-13.1
N$78: R71.1 R72.2 SI2302-14.1
N$79: C4.2 R79.1 U2.2 U2.6
N$80: R79.2 VR1.2 VR1.3
N$81: R80.2 U2.3 VR1.1
N$82: 2N6517.2 R80.1
N$83: 2N6517.3 C5.1 U$35.P$2 U$36.P$1 U$42.P$2
N$84: C7.1 U$36.P$2 U$37.P$1
N$85: C5.2 U$37.P$2 U$38.P$1
N$86: R81.2 R82.2 U$38.P$2 U$39.P$1
N$87: D1.C D2.A
N$88: D2.C D3.A
N$89: D3.C D4.A
N$90: D4.C D5.A
N$91: D5.C R81.1
N$92: R82.1 R83.1
N$93: R83.2 R84.2
N$94: R84.1 R85.1
N$95: R85.2 R86.2
N$96: R86.1 U$40.P$1
N$97: BC546.2 C11.1 R87.1 U$40.P$2
N$98: R100.1 R101.2 SI2302-15.1
N$99: R103.1 R104.2 SI2302-0.1
N$100: R105.1 R106.2 SI2302-16.1
N$101: R107.1 R108.2 SI2302-17.1
N$102: C3.1 C12.P+ STAB.P$5 U1.13
N$103: LED-G.C R54.2
N$150: C41.1 INA.1 R76.2
N$151: C41.2 INA.2 R77.2
NH3: R90.1 U1.15 U$41.P$8
NO2: R89.1 U1.14 U$41.P$9
NRST: R50.1 U1.7 U$43.P$11
O2: U1.17 U$41.P$3
OC1: R34.2 U$14.6
OC2: R3.2 U$22.6
OD1: R35.2 U$14.8
OD2: R5.2 U$22.8
PL1: JP1.17 JP2.17 JP3.17 JP4.17 JP5.17 JP6.17
PL1-GND: JP1.11 JP1.12 LED-G1.C SI2302-8.3
PL1-KVCC: BKU.15 R28.2
PL2: JP1.18 JP2.18 JP3.18 JP4.18 JP5.18 JP6.18
PL2-GND: JP2.11 JP2.12 LED-G2.C SI2302-7.3
PL2-KVCC: BKU.16 R29.2
PL3: JP1.19 JP2.19 JP3.19 JP4.19 JP5.19 JP6.19
PL3-GND: JP3.11 JP3.12 LED-G3.C SI2302-6.3
PL3-KVCC: BKU.17 R27.2
PL4: JP1.20 JP2.20 JP3.20 JP4.20 JP5.20 JP6.20
PL4-GND: JP4.11 JP4.12 LED-G4.C SI2302-5.3
PL4-KVCC: BKU.18 R30.2
PL5-GND: JP5.11 JP5.12 LED-G5.C SI2302-4.3
PL5-KVCC: BKU.19 R26.2
PL6-GND: JP6.11 JP6.12 LED-G6.C SI2302-3.3
PL6-KVCC: BKU.20 R31.2
RX-S: U1.52 U$43.P$4
SCL-TM: BKU.10 BSK5.5 INA.5 JP1.13 JP2.13 JP3.13 JP4.13 JP5.13 JP6.13
SCL-TM1: BKU1.12 INA1.5 INA1.7
SCL-TM2: BSK2.7 U1.29
SDA-TM: BKU.12 BSK5.7 INA.6 JP1.14 JP2.14 JP3.14 JP4.14 JP5.14 JP6.14
SDA-TM1: BKU1.13 INA1.6
SDA-TM2: BSK2.8 U1.30
SENS-EXT-SCL: BME280.P$3 MS5611.P$5 R112.2 U1.41
SENS-EXT-SDA: BME280.P$4 MS5611.P$4 R111.2 U1.40
SENS-INT-SCL: R55.2 U1.58 U$41.P$12
SENS-INT-SDA: R56.2 U1.59 U$41.P$13
SINS-KVCC: BKU1.11 BSK1.6
SP+: U$20.1 U$20.2 U$20.3 U$20.4 U$20.P$1 U$20.P$2
SP+1: U$1.1 U$1.2 U$1.3 U$1.4 U$1.P$1 U$1.P$2
SP+2: U$3.1 U$3.2 U$3.3 U$3.4 U$3.P$1 U$3.P$2
SP+3: R75.1 R77.1 U$18.1 U$18.2 U$18.3 U$18.4 U$18.P$1 U$18.P$2
SP+4: U$5.1 U$5.2 U$5.3 U$5.4 U$5.P$1 U$5.P$2
SP+5: U$6.1 U$6.2 U$6.3 U$6.4 U$6.P$1 U$6.P$2
SP+6: U$9.1 U$9.2 U$9.3 U$9.4 U$9.P$1 U$9.P$2
SP+7: R43.1 R45.1 U$11.1 U$11.2 U$11.3 U$11.4 U$11.P$1 U$11.P$2
SP-: LED_Y.C U$2.1 U$2.2 U$2.3 U$2.4 U$2.P$1 U$2.P$2
SP-1: FS8205.67 U$4.1 U$4.2 U$4.3 U$4.4 U$4.P$1 U$4.P$2 U$22.7
SP-2: U$19.1 U$19.2 U$19.3 U$19.4 U$19.P$1 U$19.P$2
SP-3: U$21.1 U$21.2 U$21.3 U$21.4 U$21.P$1 U$21.P$2
SP-4: U$12.1 U$12.2 U$12.3 U$12.4 U$12.P$1 U$12.P$2
SP-5: U$7.1 U$7.2 U$7.3 U$7.4 U$7.P$1 U$7.P$2
SP-6: U$10.1 U$10.2 U$10.3 U$10.4 U$10.P$1 U$10.P$2
SP-7: LED-Y.C U$8.1 U$8.2 U$8.3 U$8.4 U$8.P$1 U$8.P$2 U$13.67 U$14.7
SWC: R53.1 U1.49 U$43.P$10
SWD: R52.1 U1.46 U$43.P$8
TEMP: R109.2 R110.1 TEMP.1 U1.20
TIME: BKU.14 JP1.15 JP2.15 JP3.15 JP4.15 JP5.15 JP6.15
TIME1: BSK2.9 U1.50
TIME-ES: BKU.13 BSK5.8
TX-S: U1.51 U$43.P$6
VALVE: R104.1 U1.61